# Altium PCB Schaltbox.PcbDoc
Units mil, origin at the board's own origin, x right, y up, seen from the top; angles counter-clockwise.
Board outline 7464.57 x 5496.06 mil, 2 copper layers (Top Layer, Bottom Layer); 1 components, 0 nets, 7 pads, 4 vias.
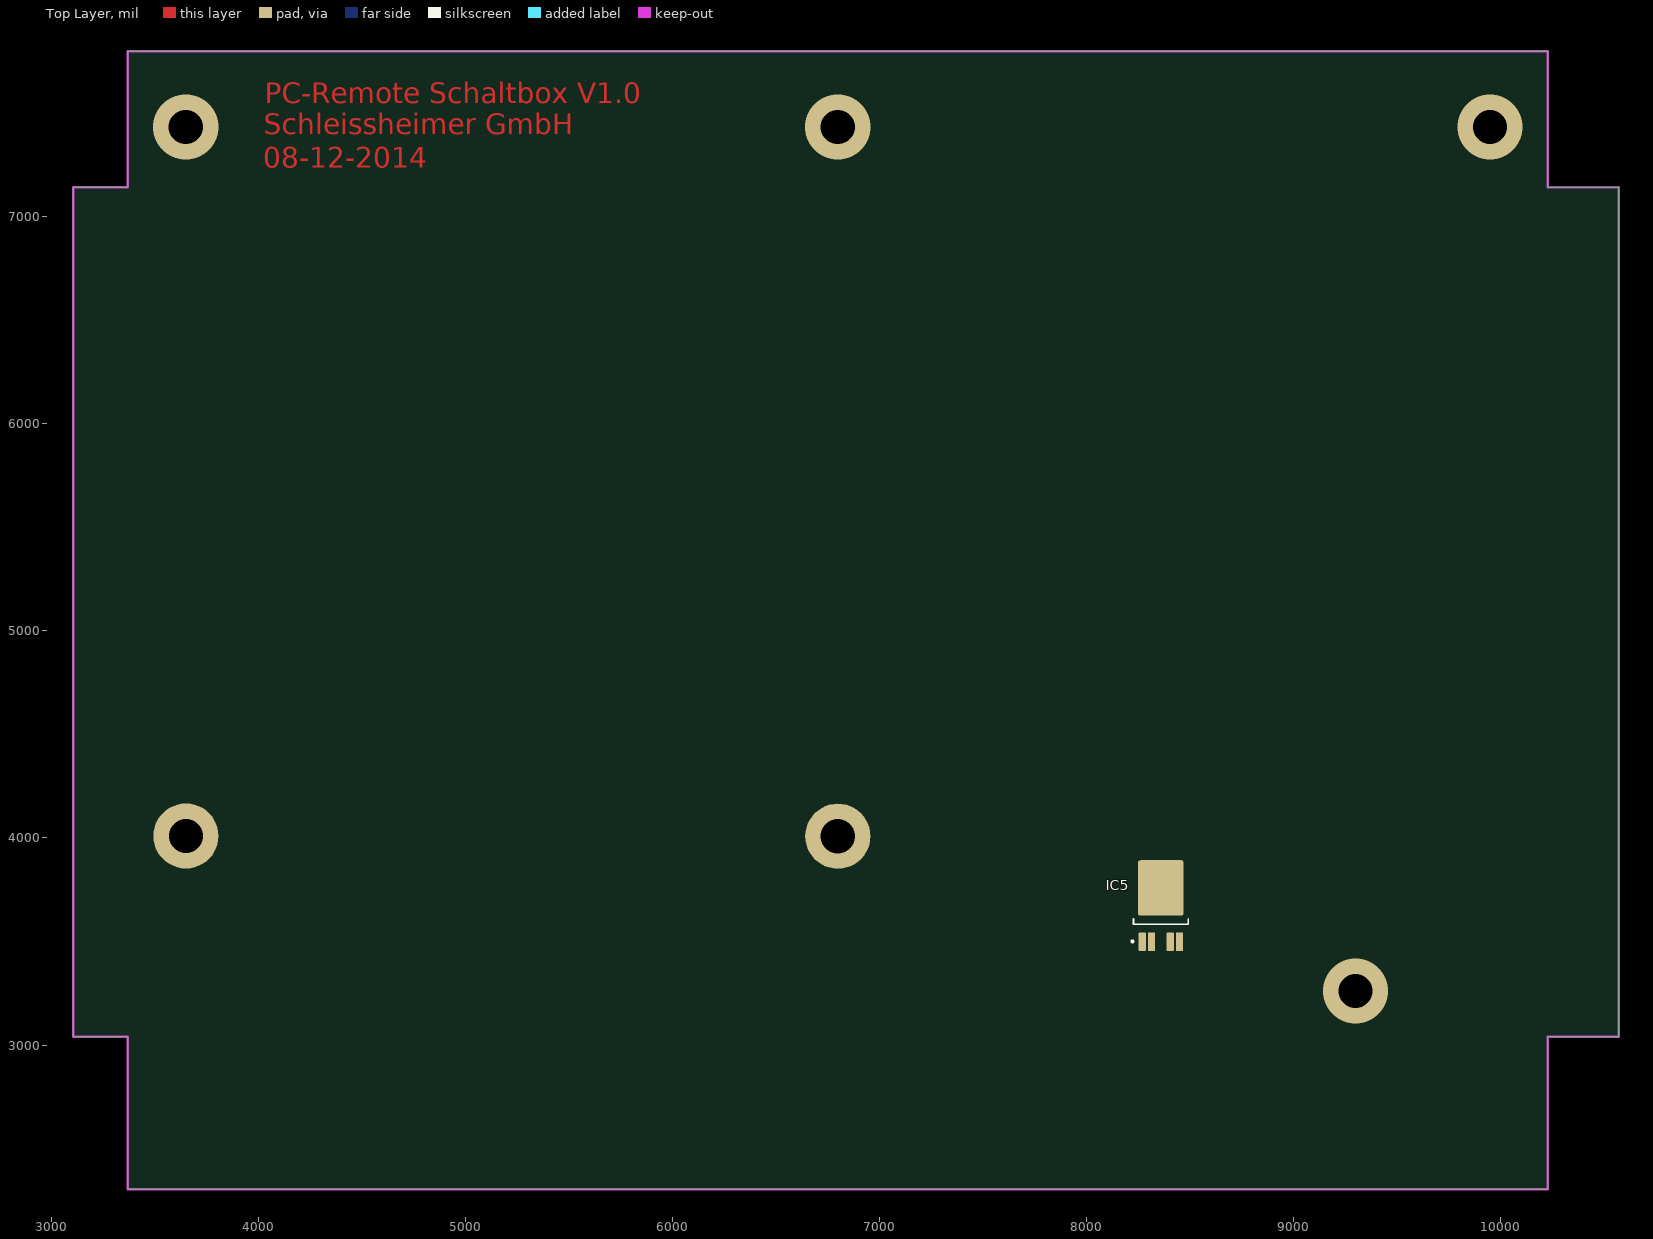
[diagram p0: Top Layer view]
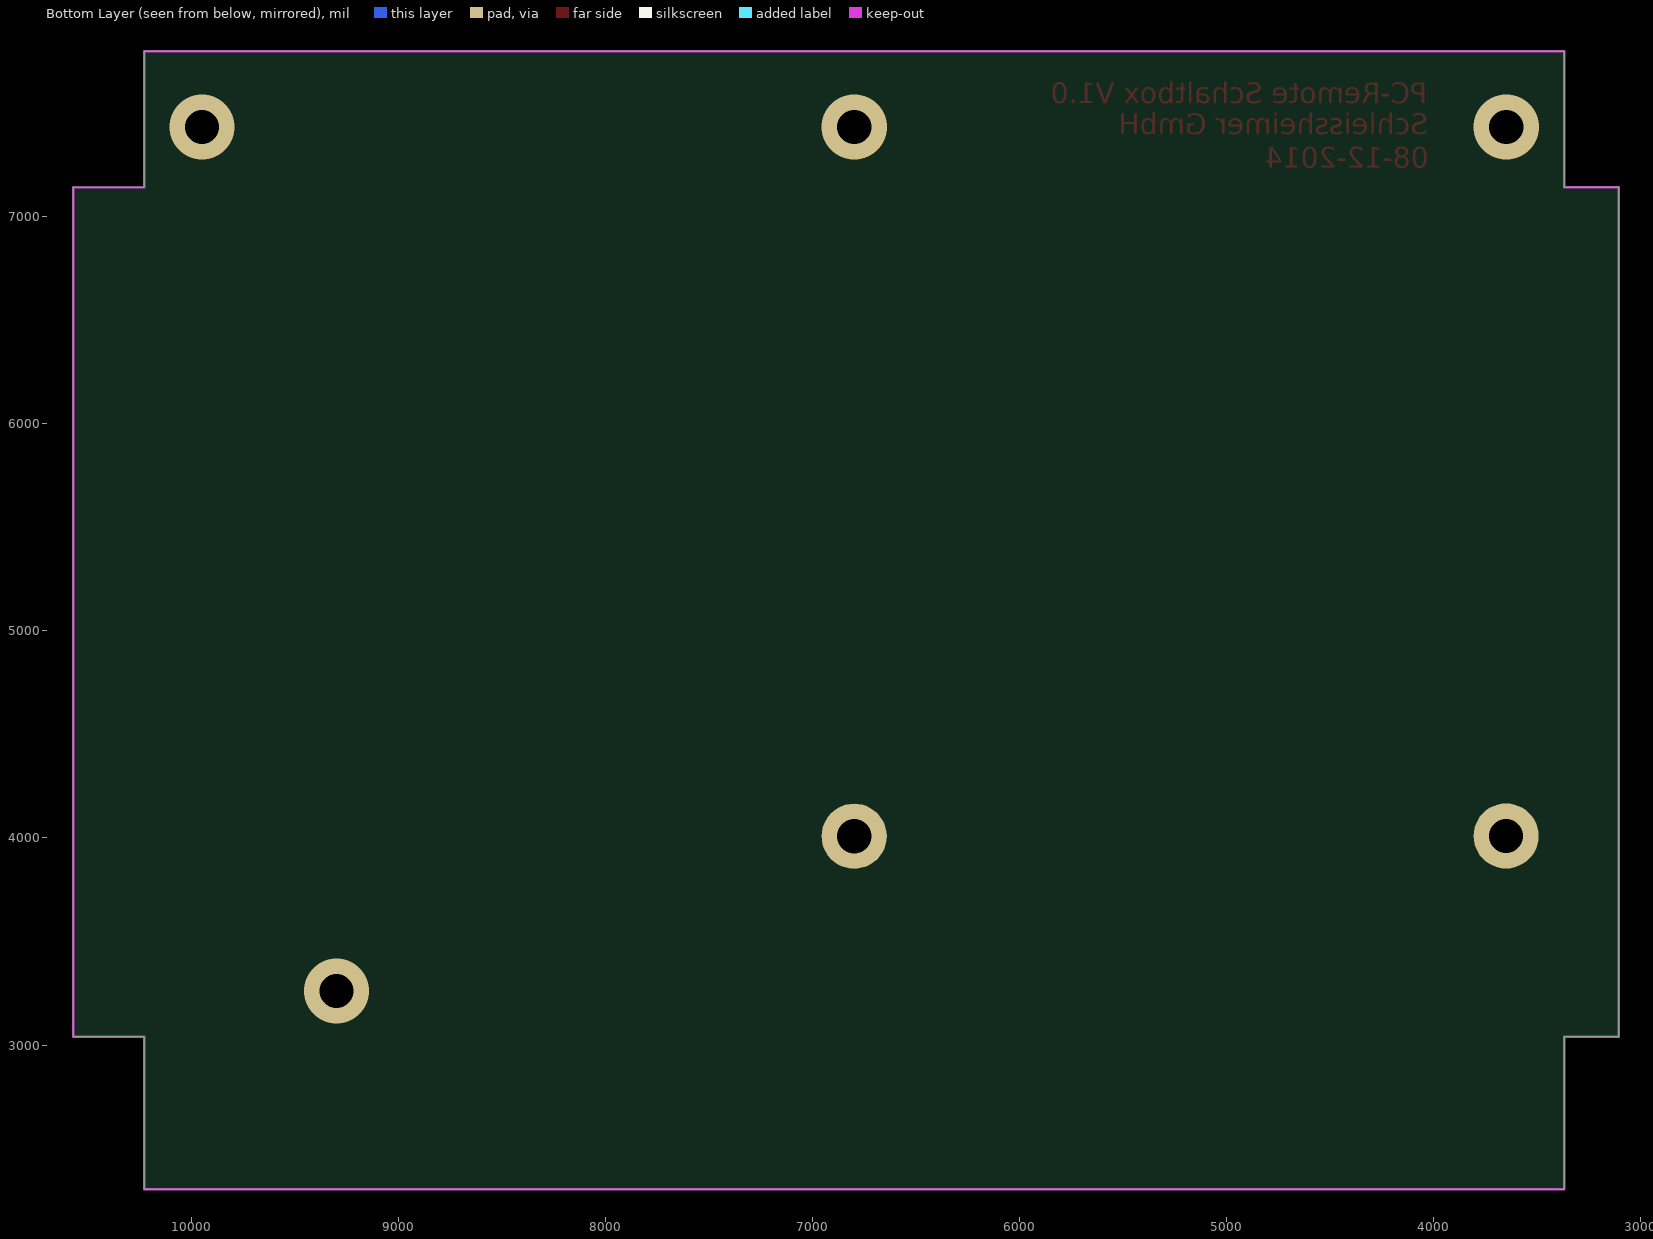
[diagram p1: Bottom Layer view, seen from below]

## Layer stack, top to bottom
Top Solder: solder mask 0.4, Solder Resist, Dk 3.5
Top Layer: signal copper 1.4
Dielectric 1: dielectric 12.6, FR-4, Dk 4.8
Bottom Layer: signal copper 1.4
Bottom Solder: solder mask 0.4, Solder Resist, Dk 3.5

## Board outline
3106.3,3040.04 3106.3,7142.4 3370.08,7142.4 3370.08,7799.88 10228.35,7799.88 10228.35,7142.4 10570.87,7142.4 10570.87,3040 10228.35,3040 10228.35,2303.82 3370.08,2303.82 3370.08,3040.04

## Design rules (kind name [scope] priority, off if disabled: settings)
Clearance [All] p1: gap=10
PolygonConnect [All] p1: connectstyle=Relief reliefconductorwidth=10 reliefentries=4 polygonreliefangle="90 Angle" airgapwidth=10
RoutingVias [All] p1: holewidth=28 width=50 viastyle="Through Hole" minholewidth=28 minwidth=50 maxholewidth=28 maxwidth=50
SolderMaskExpansion [All] p1: expansion=4
Width [All] p1: maxlimit=10 minlimit=10 preferedwidth=10
29 further rules are at their usual default settings.

## Components (designator, comment, footprint, x,y, rotation, side; value= is the part's Value field where it differs from the comment)
IC5 "BTS 433 P" TO252-5_LD_(DPAK) 8359.45,3664.21 r90 top

## Footprints (in the part's own frame and the unit in brackets; to place one, negate y for a bottom-side part, rotate by r counter-clockwise, add the part's x,y. Pads: shape width x height; smd on the part's side, far side on the other; paste and mask are expansions set on the pad)
TO252-5_LD_(DPAK) [mm] "TO252, IPC Low Density"
  rrect30% 2.3x0.9 smd: 1(-4.2,2.28) 2(-4.2,1.14) 4(-4.2,-1.14) 5(-4.2,-2.28)
  rrect10% 6.8x5.6 smd: T(2.4,0)
  silkscreen extent -4.27,-3.35 -1.4,3.61, body extent -5.1,-3.27 4.84,3.27, height 2.41

## Part data
IC5: library part "BTS443 P"

## Free pads (board coordinates)
  round 314.96 hole 165.35: 0(3650,4010) 0(6799.21,4008.54)

## Via types
v1: diameter 314.96, hole 165.35, Top Layer to Bottom Layer, 4 vias

## Nets (pads, with @x,y where several pads share a name; then routed paths per layer and width w, separated by ;. In a path a pad name is that pad's centre, name@x,y a point inside that pad or via, vN(x,y) a via of type N, cw(c..) or ccw(c..) an arc to the next point about the centre after c; other vN are vias at no path point)
pads on no net: IC5.1 IC5.2 IC5.4 IC5.5 IC5.T
copper on no net:
  other v1: 9299.21,3260.51 3649.61,7433.74 6799.21,7433.74 9948.82,7433.74

## Keep-outs
Keep-Out Layer:
  the board outline again, w11.81

## Other copper
Top Layer:
  text "PC-Remote Schaltbox V1.0" at 4031,7548.26 h98.43
  text "Schleissheimer GmbH" at 4027,7400.26 h98.43
  text "08-12-2014" at 4024,7238.26 h98.43

## Dimensions
3106.3,3040.04 to 3370.08,2303.82 on Mechanical 1
3370.08,2303.82 to 3106.3,3040.04 on Mechanical 1